# Altium PCB AVR精简学习板.PcbDoc (part 5 of 10)
Units mm, origin at the board's own origin, x right, y up, seen from the top; angles counter-clockwise.
Board outline 152.4 x 101.6 mm, 2 copper layers (Top Layer, Bottom Layer); 44 components, 51 nets, 211 pads, 6 vias.
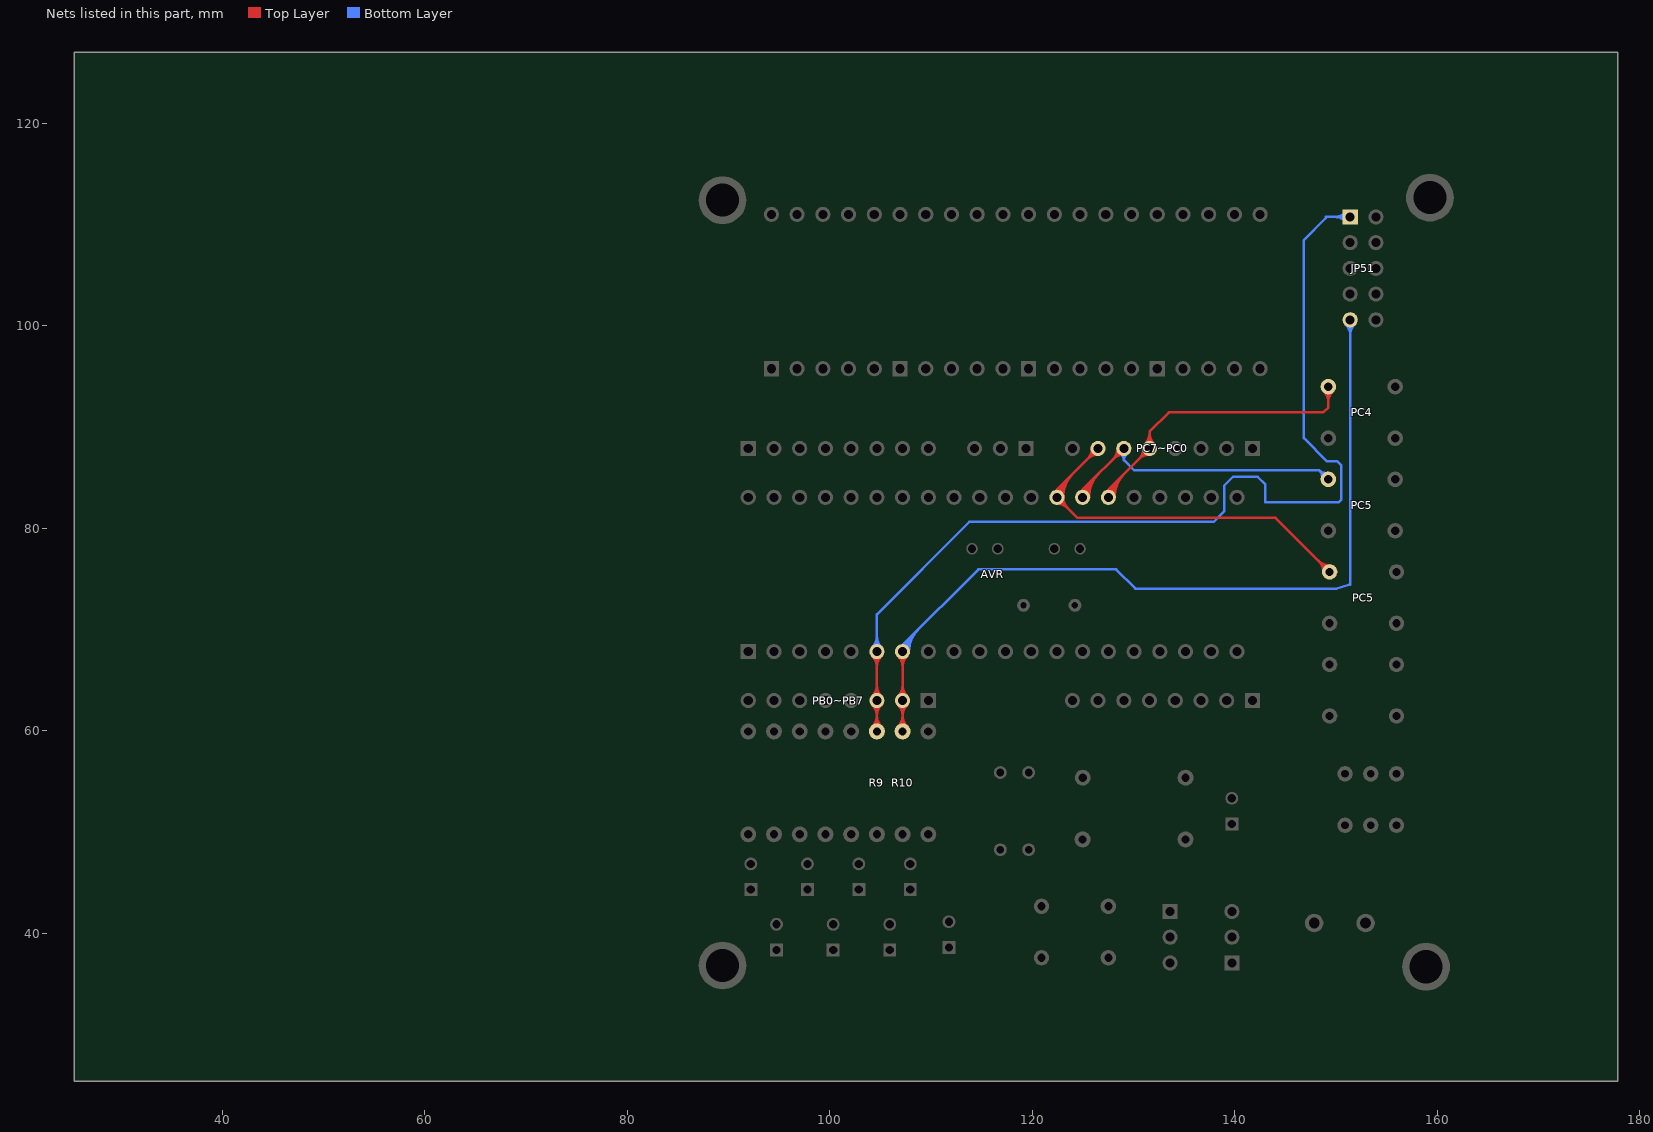
[diagram p5: the nets of this part, all layers, seen from the top]

## Via types
v1: diameter 1.27, hole 0.711, Top Layer to Bottom Layer, 6 vias

## Nets (pads, with @x,y where several pads share a name; then routed paths per layer and width w, separated by ;. In a path a pad name is that pad's centre, name@x,y a point inside that pad or via, vN(x,y) a via of type N, cw(c..) or ccw(c..) an arc to the next point about the centre after c; other vN are vias at no path point) (continued)
MISO: AVR.7 JP51.9 PB0~PB7.2 R10.2 | length 262.9
  Top Layer w0.254: AVR.7@107.188,67.818 PB0~PB7.2@107.188,62.992 PB0~PB7.2@107.188,62.992 R10.2@107.189,59.94 ; R10.2@106.722,60.407 ccw(c105.595,61.535) 107.189,61.535 ; R10.2@106.722,60.407 ccw(c105.595,61.535) 107.189,61.535 ; R10.2@106.722,60.407 ccw(c105.595,61.535) 107.189,61.535 ; R10.2@106.722,60.407 ccw(c105.595,61.535) 107.189,61.535 ; R10.2@106.722,60.407 ccw(c105.595,61.535) 107.189,61.535 ; R10.2@106.722,60.407 ccw(c105.595,61.535) 107.189,61.535 ; R10.2@106.722,60.407 ccw(c105.595,61.535) 107.189,61.535 ; PB0~PB7.2@106.747,62.551 cw(c105.682,61.486) 107.189,61.486 ; PB0~PB7.2@106.747,62.551 cw(c105.682,61.486) 107.189,61.486 ; PB0~PB7.2@106.747,62.551 cw(c105.682,61.486) 107.189,61.486 ; PB0~PB7.2@106.747,62.551 cw(c105.682,61.486) 107.189,61.486 ; PB0~PB7.2@106.747,62.551 cw(c105.682,61.486) 107.189,61.486 ; PB0~PB7.2@106.747,62.551 cw(c105.682,61.486) 107.189,61.486 ; PB0~PB7.2@106.747,62.551 cw(c105.682,61.486) 107.189,61.486 ; PB0~PB7.2@106.747,63.433 ccw(c105.684,64.496) 107.188,64.496 ; PB0~PB7.2@106.747,63.433 ccw(c105.684,64.496) 107.188,64.496 ; PB0~PB7.2@106.747,63.433 ccw(c105.684,64.496) 107.188,64.496 ; PB0~PB7.2@106.747,63.433 ccw(c105.684,64.496) 107.188,64.496 ; PB0~PB7.2@106.747,63.433 ccw(c105.684,64.496) 107.188,64.496 ; PB0~PB7.2@106.747,63.433 ccw(c105.684,64.496) 107.188,64.496 ; PB0~PB7.2@106.747,63.433 ccw(c105.684,64.496) 107.188,64.496 ; AVR.7@106.747,67.377 cw(c105.684,66.314) 107.188,66.314 ; AVR.7@106.747,67.377 cw(c105.684,66.314) 107.188,66.314 ; AVR.7@106.747,67.377 cw(c105.684,66.314) 107.188,66.314 ; AVR.7@106.747,67.377 cw(c105.684,66.314) 107.188,66.314 ; AVR.7@106.747,67.377 cw(c105.684,66.314) 107.188,66.314 ; AVR.7@106.747,67.377 cw(c105.684,66.314) 107.188,66.314 ; AVR.7@106.747,67.377 cw(c105.684,66.314) 107.188,66.314 ; R10.2@106.902,60.228 ccw(c106.208,60.921) 107.189,60.921 ; R10.2@106.902,60.228 ccw(c106.208,60.921) 107.189,60.921 ; R10.2@106.902,60.228 ccw(c106.208,60.921) 107.189,60.921 ; R10.2@106.902,60.228 ccw(c106.208,60.921) 107.189,60.921 ; R10.2@106.902,60.228 ccw(c106.208,60.921) 107.189,60.921 ; R10.2@106.902,60.228 ccw(c106.208,60.921) 107.189,60.921 ; R10.2@106.902,60.228 ccw(c106.208,60.921) 107.189,60.921 ; PB0~PB7.2@106.927,62.731 cw(c106.295,62.099) 107.189,62.099 ; PB0~PB7.2@106.927,62.731 cw(c106.295,62.099) 107.189,62.099 ; PB0~PB7.2@106.927,62.731 cw(c106.295,62.099) 107.189,62.099 ; PB0~PB7.2@106.927,62.731 cw(c106.295,62.099) 107.189,62.099 ; PB0~PB7.2@106.927,62.731 cw(c106.295,62.099) 107.189,62.099 ; PB0~PB7.2@106.927,62.731 cw(c106.295,62.099) 107.189,62.099 ; PB0~PB7.2@106.927,62.731 cw(c106.295,62.099) 107.189,62.099 ; PB0~PB7.2@106.927,63.253 ccw(c106.297,63.883) 107.188,63.883 ; PB0~PB7.2@106.927,63.253 ccw(c106.297,63.883) 107.188,63.883 ; PB0~PB7.2@106.927,63.253 ccw(c106.297,63.883) 107.188,63.883 ; PB0~PB7.2@106.927,63.253 ccw(c106.297,63.883) 107.188,63.883 ; PB0~PB7.2@106.927,63.253 ccw(c106.297,63.883) 107.188,63.883 ; PB0~PB7.2@106.927,63.253 ccw(c106.297,63.883) 107.188,63.883 ; PB0~PB7.2@106.927,63.253 ccw(c106.297,63.883) 107.188,63.883 ; AVR.7@106.927,67.557 cw(c106.297,66.927) 107.188,66.927 ; AVR.7@106.927,67.557 cw(c106.297,66.927) 107.188,66.927 ; AVR.7@106.927,67.557 cw(c106.297,66.927) 107.188,66.927 ; AVR.7@106.927,67.557 cw(c106.297,66.927) 107.188,66.927 ; AVR.7@106.927,67.557 cw(c106.297,66.927) 107.188,66.927 ; AVR.7@106.927,67.557 cw(c106.297,66.927) 107.188,66.927 ; AVR.7@106.927,67.557 cw(c106.297,66.927) 107.188,66.927 ; 107.188,63.883 ccw(c108.079,63.883) PB0~PB7.2@107.449,63.253 ; 107.188,63.883 ccw(c108.079,63.883) PB0~PB7.2@107.449,63.253 ; 107.188,63.883 ccw(c108.079,63.883) PB0~PB7.2@107.449,63.253 ; 107.188,63.883 ccw(c108.079,63.883) PB0~PB7.2@107.449,63.253 ; 107.188,63.883 ccw(c108.079,63.883) PB0~PB7.2@107.449,63.253 ; 107.188,63.883 ccw(c108.079,63.883) PB0~PB7.2@107.449,63.253 ; 107.188,63.883 ccw(c108.079,63.883) PB0~PB7.2@107.449,63.253 ; 107.188,64.496 ccw(c108.692,64.496) PB0~PB7.2@107.629,63.433 ; 107.188,64.496 ccw(c108.692,64.496) PB0~PB7.2@107.629,63.433 ; 107.188,64.496 ccw(c108.692,64.496) PB0~PB7.2@107.629,63.433 ; 107.188,64.496 ccw(c108.692,64.496) PB0~PB7.2@107.629,63.433 ; 107.188,64.496 ccw(c108.692,64.496) PB0~PB7.2@107.629,63.433 ; 107.188,64.496 ccw(c108.692,64.496) PB0~PB7.2@107.629,63.433 ; 107.188,64.496 ccw(c108.692,64.496) PB0~PB7.2@107.629,63.433 ; 107.188,66.314 cw(c108.692,66.314) AVR.7@107.629,67.377 ; 107.188,66.314 cw(c108.692,66.314) AVR.7@107.629,67.377 ; 107.188,66.314 cw(c108.692,66.314) AVR.7@107.629,67.377 ; 107.188,66.314 cw(c108.692,66.314) AVR.7@107.629,67.377 ; 107.188,66.314 cw(c108.692,66.314) AVR.7@107.629,67.377 ; 107.188,66.314 cw(c108.692,66.314) AVR.7@107.629,67.377 ; 107.188,66.314 cw(c108.692,66.314) AVR.7@107.629,67.377 ; 107.188,66.927 cw(c108.079,66.927) AVR.7@107.449,67.557 ; 107.188,66.927 cw(c108.079,66.927) AVR.7@107.449,67.557 ; 107.188,66.927 cw(c108.079,66.927) AVR.7@107.449,67.557 ; 107.188,66.927 cw(c108.079,66.927) AVR.7@107.449,67.557 ; 107.188,66.927 cw(c108.079,66.927) AVR.7@107.449,67.557 ; 107.188,66.927 cw(c108.079,66.927) AVR.7@107.449,67.557 ; 107.188,66.927 cw(c108.079,66.927) AVR.7@107.449,67.557 ; 107.189,60.921 ccw(c108.17,60.921) R10.2@107.476,60.228 ; 107.189,60.921 ccw(c108.17,60.921) R10.2@107.476,60.228 ; 107.189,60.921 ccw(c108.17,60.921) R10.2@107.476,60.228 ; 107.189,60.921 ccw(c108.17,60.921) R10.2@107.476,60.228 ; 107.189,60.921 ccw(c108.17,60.921) R10.2@107.476,60.228 ; 107.189,60.921 ccw(c108.17,60.921) R10.2@107.476,60.228 ; 107.189,60.921 ccw(c108.17,60.921) R10.2@107.476,60.228 ; 107.189,61.49 cw(c108.69,61.49) PB0~PB7.2@107.629,62.551 ; 107.189,61.49 cw(c108.69,61.49) PB0~PB7.2@107.629,62.551 ; 107.189,61.49 cw(c108.69,61.49) PB0~PB7.2@107.629,62.551 ; 107.189,61.49 cw(c108.69,61.49) PB0~PB7.2@107.629,62.551 ; 107.189,61.49 cw(c108.69,61.49) PB0~PB7.2@107.629,62.551 ; 107.189,61.49 cw(c108.69,61.49) PB0~PB7.2@107.629,62.551 ; 107.189,61.49 cw(c108.69,61.49) PB0~PB7.2@107.629,62.551 ; 107.189,61.535 ccw(c108.783,61.535) R10.2@107.656,60.407 ; 107.189,61.535 ccw(c108.783,61.535) R10.2@107.656,60.407 ; 107.189,61.535 ccw(c108.783,61.535) R10.2@107.656,60.407 ; 107.189,61.535 ccw(c108.783,61.535) R10.2@107.656,60.407 ; 107.189,61.535 ccw(c108.783,61.535) R10.2@107.656,60.407 ; 107.189,61.535 ccw(c108.783,61.535) R10.2@107.656,60.407 ; 107.189,61.535 ccw(c108.783,61.535) R10.2@107.656,60.407 ; 107.189,62.104 cw(c108.076,62.104) PB0~PB7.2@107.449,62.731 ; 107.189,62.104 cw(c108.076,62.104) PB0~PB7.2@107.449,62.731 ; 107.189,62.104 cw(c108.076,62.104) PB0~PB7.2@107.449,62.731 ; 107.189,62.104 cw(c108.076,62.104) PB0~PB7.2@107.449,62.731 ; 107.189,62.104 cw(c108.076,62.104) PB0~PB7.2@107.449,62.731 ; 107.189,62.104 cw(c108.076,62.104) PB0~PB7.2@107.449,62.731 ; 107.189,62.104 cw(c108.076,62.104) PB0~PB7.2@107.449,62.731
  Bottom Layer w0.254: AVR.7@107.188,67.818 107.188,68.453 114.681,75.946 128.27,75.946 130.175,74.041 149.987,74.041 151.257,74.422 ; 151.384,74.422 JP51.9@151.384,100.584 ; AVR.7@107.049,67.818 cw(c108.246,67.818) 107.4,68.665 ; AVR.7@107.049,67.818 cw(c108.246,67.818) 107.4,68.665 ; AVR.7@107.049,67.818 cw(c108.246,67.818) 107.4,68.665 ; AVR.7@107.049,67.818 cw(c108.246,67.818) 107.4,68.665 ; AVR.7@107.049,67.818 cw(c108.246,67.818) 107.4,68.665 ; AVR.7@107.049,67.818 cw(c108.246,67.818) 107.4,68.665 ; AVR.7@107.049,67.818 cw(c108.246,67.818) 107.4,68.665 ; AVR.7@107.303,67.818 cw(c109.114,67.818) 107.833,69.098 ; AVR.7@107.303,67.818 cw(c109.114,67.818) 107.833,69.098 ; AVR.7@107.303,67.818 cw(c109.114,67.818) 107.833,69.098 ; AVR.7@107.303,67.818 cw(c109.114,67.818) 107.833,69.098 ; AVR.7@107.303,67.818 cw(c109.114,67.818) 107.833,69.098 ; AVR.7@107.303,67.818 cw(c109.114,67.818) 107.833,69.098 ; AVR.7@107.303,67.818 cw(c109.114,67.818) 107.833,69.098 ; AVR.7@107.557,67.818 cw(c109.981,67.818) 108.267,69.532 ; AVR.7@107.557,67.818 cw(c109.981,67.818) 108.267,69.532 ; AVR.7@107.557,67.818 cw(c109.981,67.818) 108.267,69.532 ; AVR.7@107.557,67.818 cw(c109.981,67.818) 108.267,69.532 ; AVR.7@107.557,67.818 cw(c109.981,67.818) 108.267,69.532 ; AVR.7@107.557,67.818 cw(c109.981,67.818) 108.267,69.532 ; AVR.7@107.557,67.818 cw(c109.981,67.818) 108.267,69.532 ; AVR.7@107.811,67.818 cw(c110.848,67.818) 108.701,69.966 ; AVR.7@107.811,67.818 cw(c110.848,67.818) 108.701,69.966 ; AVR.7@107.811,67.818 cw(c110.848,67.818) 108.701,69.966 ; AVR.7@107.811,67.818 cw(c110.848,67.818) 108.701,69.966 ; AVR.7@107.811,67.818 cw(c110.848,67.818) 108.701,69.966 ; AVR.7@107.811,67.818 cw(c110.848,67.818) 108.701,69.966 ; AVR.7@107.811,67.818 cw(c110.848,67.818) 108.701,69.966 ; JP51.9@150.943,100.143 cw(c149.88,99.08) 151.384,99.08 ; JP51.9@150.943,100.143 cw(c149.88,99.08) 151.384,99.08 ; JP51.9@150.943,100.143 cw(c149.88,99.08) 151.384,99.08 ; JP51.9@150.943,100.143 cw(c149.88,99.08) 151.384,99.08 ; JP51.9@150.943,100.143 cw(c149.88,99.08) 151.384,99.08 ; JP51.9@150.943,100.143 cw(c149.88,99.08) 151.384,99.08 ; JP51.9@150.943,100.143 cw(c149.88,99.08) 151.384,99.08 ; JP51.9@151.123,100.323 cw(c150.493,99.693) 151.384,99.693 ; JP51.9@151.123,100.323 cw(c150.493,99.693) 151.384,99.693 ; JP51.9@151.123,100.323 cw(c150.493,99.693) 151.384,99.693 ; JP51.9@151.123,100.323 cw(c150.493,99.693) 151.384,99.693 ; JP51.9@151.123,100.323 cw(c150.493,99.693) 151.384,99.693 ; JP51.9@151.123,100.323 cw(c150.493,99.693) 151.384,99.693 ; JP51.9@151.123,100.323 cw(c150.493,99.693) 151.384,99.693 ; 151.384,99.08 cw(c152.888,99.08) JP51.9@151.825,100.143 ; 151.384,99.08 cw(c152.888,99.08) JP51.9@151.825,100.143 ; 151.384,99.08 cw(c152.888,99.08) JP51.9@151.825,100.143 ; 151.384,99.08 cw(c152.888,99.08) JP51.9@151.825,100.143 ; 151.384,99.08 cw(c152.888,99.08) JP51.9@151.825,100.143 ; 151.384,99.08 cw(c152.888,99.08) JP51.9@151.825,100.143 ; 151.384,99.08 cw(c152.888,99.08) JP51.9@151.825,100.143 ; 151.384,99.693 cw(c152.275,99.693) JP51.9@151.645,100.323 ; 151.384,99.693 cw(c152.275,99.693) JP51.9@151.645,100.323 ; 151.384,99.693 cw(c152.275,99.693) JP51.9@151.645,100.323 ; 151.384,99.693 cw(c152.275,99.693) JP51.9@151.645,100.323 ; 151.384,99.693 cw(c152.275,99.693) JP51.9@151.645,100.323 ; 151.384,99.693 cw(c152.275,99.693) JP51.9@151.645,100.323 ; 151.384,99.693 cw(c152.275,99.693) JP51.9@151.645,100.323
MOSI: AVR.6 JP51.1 PB0~PB7.3 R9.2 | length 260.1
  Top Layer w0.254: AVR.6@104.648,67.818 PB0~PB7.3@104.648,62.992 PB0~PB7.3@104.648,62.992 R9.2@104.649,59.94 ; R9.2@104.182,60.407 ccw(c103.055,61.535) 104.649,61.535 ; R9.2@104.182,60.407 ccw(c103.055,61.535) 104.649,61.535 ; R9.2@104.182,60.407 ccw(c103.055,61.535) 104.649,61.535 ; R9.2@104.182,60.407 ccw(c103.055,61.535) 104.649,61.535 ; R9.2@104.182,60.407 ccw(c103.055,61.535) 104.649,61.535 ; R9.2@104.182,60.407 ccw(c103.055,61.535) 104.649,61.535 ; R9.2@104.182,60.407 ccw(c103.055,61.535) 104.649,61.535 ; PB0~PB7.3@104.207,62.551 cw(c103.142,61.486) 104.649,61.486 ; PB0~PB7.3@104.207,62.551 cw(c103.142,61.486) 104.649,61.486 ; PB0~PB7.3@104.207,62.551 cw(c103.142,61.486) 104.649,61.486 ; PB0~PB7.3@104.207,62.551 cw(c103.142,61.486) 104.649,61.486 ; PB0~PB7.3@104.207,62.551 cw(c103.142,61.486) 104.649,61.486 ; PB0~PB7.3@104.207,62.551 cw(c103.142,61.486) 104.649,61.486 ; PB0~PB7.3@104.207,62.551 cw(c103.142,61.486) 104.649,61.486 ; PB0~PB7.3@104.207,63.433 ccw(c103.144,64.496) 104.648,64.496 ; PB0~PB7.3@104.207,63.433 ccw(c103.144,64.496) 104.648,64.496 ; PB0~PB7.3@104.207,63.433 ccw(c103.144,64.496) 104.648,64.496 ; PB0~PB7.3@104.207,63.433 ccw(c103.144,64.496) 104.648,64.496 ; PB0~PB7.3@104.207,63.433 ccw(c103.144,64.496) 104.648,64.496 ; PB0~PB7.3@104.207,63.433 ccw(c103.144,64.496) 104.648,64.496 ; PB0~PB7.3@104.207,63.433 ccw(c103.144,64.496) 104.648,64.496 ; AVR.6@104.207,67.377 cw(c103.144,66.314) 104.648,66.314 ; AVR.6@104.207,67.377 cw(c103.144,66.314) 104.648,66.314 ; AVR.6@104.207,67.377 cw(c103.144,66.314) 104.648,66.314 ; AVR.6@104.207,67.377 cw(c103.144,66.314) 104.648,66.314 ; AVR.6@104.207,67.377 cw(c103.144,66.314) 104.648,66.314 ; AVR.6@104.207,67.377 cw(c103.144,66.314) 104.648,66.314 ; AVR.6@104.207,67.377 cw(c103.144,66.314) 104.648,66.314 ; R9.2@104.362,60.228 ccw(c103.668,60.921) 104.649,60.921 ; R9.2@104.362,60.228 ccw(c103.668,60.921) 104.649,60.921 ; R9.2@104.362,60.228 ccw(c103.668,60.921) 104.649,60.921 ; R9.2@104.362,60.228 ccw(c103.668,60.921) 104.649,60.921 ; R9.2@104.362,60.228 ccw(c103.668,60.921) 104.649,60.921 ; R9.2@104.362,60.228 ccw(c103.668,60.921) 104.649,60.921 ; R9.2@104.362,60.228 ccw(c103.668,60.921) 104.649,60.921 ; PB0~PB7.3@104.387,62.731 cw(c103.755,62.099) 104.649,62.099 ; PB0~PB7.3@104.387,62.731 cw(c103.755,62.099) 104.649,62.099 ; PB0~PB7.3@104.387,62.731 cw(c103.755,62.099) 104.649,62.099 ; PB0~PB7.3@104.387,62.731 cw(c103.755,62.099) 104.649,62.099 ; PB0~PB7.3@104.387,62.731 cw(c103.755,62.099) 104.649,62.099 ; PB0~PB7.3@104.387,62.731 cw(c103.755,62.099) 104.649,62.099 ; PB0~PB7.3@104.387,62.731 cw(c103.755,62.099) 104.649,62.099 ; PB0~PB7.3@104.387,63.253 ccw(c103.757,63.883) 104.648,63.883 ; PB0~PB7.3@104.387,63.253 ccw(c103.757,63.883) 104.648,63.883 ; PB0~PB7.3@104.387,63.253 ccw(c103.757,63.883) 104.648,63.883 ; PB0~PB7.3@104.387,63.253 ccw(c103.757,63.883) 104.648,63.883 ; PB0~PB7.3@104.387,63.253 ccw(c103.757,63.883) 104.648,63.883 ; PB0~PB7.3@104.387,63.253 ccw(c103.757,63.883) 104.648,63.883 ; PB0~PB7.3@104.387,63.253 ccw(c103.757,63.883) 104.648,63.883 ; AVR.6@104.387,67.557 cw(c103.757,66.927) 104.648,66.927 ; AVR.6@104.387,67.557 cw(c103.757,66.927) 104.648,66.927 ; AVR.6@104.387,67.557 cw(c103.757,66.927) 104.648,66.927 ; AVR.6@104.387,67.557 cw(c103.757,66.927) 104.648,66.927 ; AVR.6@104.387,67.557 cw(c103.757,66.927) 104.648,66.927 ; AVR.6@104.387,67.557 cw(c103.757,66.927) 104.648,66.927 ; AVR.6@104.387,67.557 cw(c103.757,66.927) 104.648,66.927 ; 104.648,63.883 ccw(c105.539,63.883) PB0~PB7.3@104.909,63.253 ; 104.648,63.883 ccw(c105.539,63.883) PB0~PB7.3@104.909,63.253 ; 104.648,63.883 ccw(c105.539,63.883) PB0~PB7.3@104.909,63.253 ; 104.648,63.883 ccw(c105.539,63.883) PB0~PB7.3@104.909,63.253 ; 104.648,63.883 ccw(c105.539,63.883) PB0~PB7.3@104.909,63.253 ; 104.648,63.883 ccw(c105.539,63.883) PB0~PB7.3@104.909,63.253 ; 104.648,63.883 ccw(c105.539,63.883) PB0~PB7.3@104.909,63.253 ; 104.648,64.496 ccw(c106.152,64.496) PB0~PB7.3@105.089,63.433 ; 104.648,64.496 ccw(c106.152,64.496) PB0~PB7.3@105.089,63.433 ; 104.648,64.496 ccw(c106.152,64.496) PB0~PB7.3@105.089,63.433 ; 104.648,64.496 ccw(c106.152,64.496) PB0~PB7.3@105.089,63.433 ; 104.648,64.496 ccw(c106.152,64.496) PB0~PB7.3@105.089,63.433 ; 104.648,64.496 ccw(c106.152,64.496) PB0~PB7.3@105.089,63.433 ; 104.648,64.496 ccw(c106.152,64.496) PB0~PB7.3@105.089,63.433 ; 104.648,66.314 cw(c106.152,66.314) AVR.6@105.089,67.377 ; 104.648,66.314 cw(c106.152,66.314) AVR.6@105.089,67.377 ; 104.648,66.314 cw(c106.152,66.314) AVR.6@105.089,67.377 ; 104.648,66.314 cw(c106.152,66.314) AVR.6@105.089,67.377 ; 104.648,66.314 cw(c106.152,66.314) AVR.6@105.089,67.377 ; 104.648,66.314 cw(c106.152,66.314) AVR.6@105.089,67.377 ; 104.648,66.314 cw(c106.152,66.314) AVR.6@105.089,67.377 ; 104.648,66.927 cw(c105.539,66.927) AVR.6@104.909,67.557 ; 104.648,66.927 cw(c105.539,66.927) AVR.6@104.909,67.557 ; 104.648,66.927 cw(c105.539,66.927) AVR.6@104.909,67.557 ; 104.648,66.927 cw(c105.539,66.927) AVR.6@104.909,67.557 ; 104.648,66.927 cw(c105.539,66.927) AVR.6@104.909,67.557 ; 104.648,66.927 cw(c105.539,66.927) AVR.6@104.909,67.557 ; 104.648,66.927 cw(c105.539,66.927) AVR.6@104.909,67.557 ; 104.649,60.921 ccw(c105.63,60.921) R9.2@104.936,60.228 ; 104.649,60.921 ccw(c105.63,60.921) R9.2@104.936,60.228 ; 104.649,60.921 ccw(c105.63,60.921) R9.2@104.936,60.228 ; 104.649,60.921 ccw(c105.63,60.921) R9.2@104.936,60.228 ; 104.649,60.921 ccw(c105.63,60.921) R9.2@104.936,60.228 ; 104.649,60.921 ccw(c105.63,60.921) R9.2@104.936,60.228 ; 104.649,60.921 ccw(c105.63,60.921) R9.2@104.936,60.228 ; 104.649,61.49 cw(c106.15,61.49) PB0~PB7.3@105.089,62.551 ; 104.649,61.49 cw(c106.15,61.49) PB0~PB7.3@105.089,62.551 ; 104.649,61.49 cw(c106.15,61.49) PB0~PB7.3@105.089,62.551 ; 104.649,61.49 cw(c106.15,61.49) PB0~PB7.3@105.089,62.551 ; 104.649,61.49 cw(c106.15,61.49) PB0~PB7.3@105.089,62.551 ; 104.649,61.49 cw(c106.15,61.49) PB0~PB7.3@105.089,62.551 ; 104.649,61.49 cw(c106.15,61.49) PB0~PB7.3@105.089,62.551 ; 104.649,61.535 ccw(c106.243,61.535) R9.2@105.116,60.407 ; 104.649,61.535 ccw(c106.243,61.535) R9.2@105.116,60.407 ; 104.649,61.535 ccw(c106.243,61.535) R9.2@105.116,60.407 ; 104.649,61.535 ccw(c106.243,61.535) R9.2@105.116,60.407 ; 104.649,61.535 ccw(c106.243,61.535) R9.2@105.116,60.407 ; 104.649,61.535 ccw(c106.243,61.535) R9.2@105.116,60.407 ; 104.649,61.535 ccw(c106.243,61.535) R9.2@105.116,60.407 ; 104.649,62.104 cw(c105.536,62.104) PB0~PB7.3@104.909,62.731 ; 104.649,62.104 cw(c105.536,62.104) PB0~PB7.3@104.909,62.731 ; 104.649,62.104 cw(c105.536,62.104) PB0~PB7.3@104.909,62.731 ; 104.649,62.104 cw(c105.536,62.104) PB0~PB7.3@104.909,62.731 ; 104.649,62.104 cw(c105.536,62.104) PB0~PB7.3@104.909,62.731 ; 104.649,62.104 cw(c105.536,62.104) PB0~PB7.3@104.909,62.731 ; 104.649,62.104 cw(c105.536,62.104) PB0~PB7.3@104.909,62.731
  Bottom Layer w0.254: AVR.6@104.648,67.818 104.648,71.501 113.792,80.645 137.922,80.645 138.938,81.661 138.938,84.201 139.827,85.09 142.24,85.09 143.002,84.328 143.002,82.55 150.241,82.55 150.495,82.804 150.495,86.233 150.114,86.614 149.098,86.614 146.812,88.9 146.812,108.458 148.971,110.617 148.971,110.744 JP51.1@151.384,110.744 ; AVR.6@104.207,68.259 ccw(c103.144,69.322) 104.648,69.322 ; AVR.6@104.207,68.259 ccw(c103.144,69.322) 104.648,69.322 ; AVR.6@104.207,68.259 ccw(c103.144,69.322) 104.648,69.322 ; AVR.6@104.207,68.259 ccw(c103.144,69.322) 104.648,69.322 ; AVR.6@104.207,68.259 ccw(c103.144,69.322) 104.648,69.322 ; AVR.6@104.207,68.259 ccw(c103.144,69.322) 104.648,69.322 ; AVR.6@104.207,68.259 ccw(c103.144,69.322) 104.648,69.322 ; AVR.6@104.387,68.079 ccw(c103.757,68.709) 104.648,68.709 ; AVR.6@104.387,68.079 ccw(c103.757,68.709) 104.648,68.709 ; AVR.6@104.387,68.079 ccw(c103.757,68.709) 104.648,68.709 ; AVR.6@104.387,68.079 ccw(c103.757,68.709) 104.648,68.709 ; AVR.6@104.387,68.079 ccw(c103.757,68.709) 104.648,68.709 ; AVR.6@104.387,68.079 ccw(c103.757,68.709) 104.648,68.709 ; AVR.6@104.387,68.079 ccw(c103.757,68.709) 104.648,68.709 ; 104.648,68.709 ccw(c105.539,68.709) AVR.6@104.909,68.079 ; 104.648,68.709 ccw(c105.539,68.709) AVR.6@104.909,68.079 ; 104.648,68.709 ccw(c105.539,68.709) AVR.6@104.909,68.079 ; 104.648,68.709 ccw(c105.539,68.709) AVR.6@104.909,68.079 ; 104.648,68.709 ccw(c105.539,68.709) AVR.6@104.909,68.079 ; 104.648,68.709 ccw(c105.539,68.709) AVR.6@104.909,68.079 ; 104.648,68.709 ccw(c105.539,68.709) AVR.6@104.909,68.079 ; 104.648,69.322 ccw(c106.152,69.322) AVR.6@105.089,68.259 ; 104.648,69.322 ccw(c106.152,69.322) AVR.6@105.089,68.259 ; 104.648,69.322 ccw(c106.152,69.322) AVR.6@105.089,68.259 ; 104.648,69.322 ccw(c106.152,69.322) AVR.6@105.089,68.259 ; 104.648,69.322 ccw(c106.152,69.322) AVR.6@105.089,68.259 ; 104.648,69.322 ccw(c106.152,69.322) AVR.6@105.089,68.259 ; 104.648,69.322 ccw(c106.152,69.322) AVR.6@105.089,68.259 ; 149.88,110.744 cw(c149.88,109.24) JP51.1@150.943,110.303 ; 149.88,110.744 ccw(c149.88,112.248) JP51.1@150.943,111.185 ; 149.88,110.744 cw(c149.88,109.24) JP51.1@150.943,110.303 ; 149.88,110.744 ccw(c149.88,112.248) JP51.1@150.943,111.185 ; 149.88,110.744 ccw(c149.88,112.248) JP51.1@150.943,111.185 ; 149.88,110.744 cw(c149.88,109.24) JP51.1@150.943,110.303 ; 149.88,110.744 ccw(c149.88,112.248) JP51.1@150.943,111.185 ; 149.88,110.744 cw(c149.88,109.24) JP51.1@150.943,110.303 ; 149.88,110.744 ccw(c149.88,112.248) JP51.1@150.943,111.185 ; 149.88,110.744 cw(c149.88,109.24) JP51.1@150.943,110.303 ; 149.88,110.744 ccw(c149.88,112.248) JP51.1@150.943,111.185 ; 149.88,110.744 cw(c149.88,109.24) JP51.1@150.943,110.303 ; 149.88,110.744 ccw(c149.88,112.248) JP51.1@150.943,111.185 ; 149.88,110.744 cw(c149.88,109.24) JP51.1@150.943,110.303 ; 150.493,110.744 cw(c150.493,109.853) JP51.1@151.123,110.483 ; 150.493,110.744 ccw(c150.493,111.635) JP51.1@151.123,111.005 ; 150.493,110.744 cw(c150.493,109.853) JP51.1@151.123,110.483 ; 150.493,110.744 ccw(c150.493,111.635) JP51.1@151.123,111.005 ; 150.493,110.744 ccw(c150.493,111.635) JP51.1@151.123,111.005 ; 150.493,110.744 cw(c150.493,109.853) JP51.1@151.123,110.483 ; 150.493,110.744 ccw(c150.493,111.635) JP51.1@151.123,111.005 ; 150.493,110.744 cw(c150.493,109.853) JP51.1@151.123,110.483 ; 150.493,110.744 ccw(c150.493,111.635) JP51.1@151.123,111.005 ; 150.493,110.744 cw(c150.493,109.853) JP51.1@151.123,110.483 ; 150.493,110.744 ccw(c150.493,111.635) JP51.1@151.123,111.005 ; 150.493,110.744 cw(c150.493,109.853) JP51.1@151.123,110.483 ; 150.493,110.744 ccw(c150.493,111.635) JP51.1@151.123,111.005 ; 150.493,110.744 cw(c150.493,109.853) JP51.1@151.123,110.483
Net1_0: AVR.26 PC4.0 PC7~PC0.5 | length 164.8
  Top Layer w0.254: AVR.26@127.508,83.058 127.508,83.82 ; PC4.0@149.225,93.98 149.225,91.948 148.717,91.44 133.477,91.44 131.572,89.535 PC7~PC0.5@131.572,87.884 127.508,83.82 ; AVR.26@127.369,83.058 cw(c128.873,83.058) 127.81,84.122 ; AVR.26@127.369,83.058 cw(c128.873,83.058) 127.81,84.122 ; AVR.26@127.369,83.058 cw(c128.873,83.058) 127.81,84.122 ; AVR.26@127.369,83.058 cw(c128.873,83.058) 127.81,84.122 ; AVR.26@127.369,83.058 cw(c128.873,83.058) 127.81,84.122 ; AVR.26@127.369,83.058 cw(c128.873,83.058) 127.81,84.122 ; AVR.26@127.369,83.058 cw(c128.873,83.058) 127.81,84.122 ; AVR.26@127.384,83.669 ccw(c127.354,83.82) 127.508,83.82 ; AVR.26@127.384,83.669 ccw(c127.354,83.82) 127.508,83.82 ; AVR.26@127.384,83.669 ccw(c127.354,83.82) 127.508,83.82 ; AVR.26@127.384,83.669 ccw(c127.354,83.82) 127.508,83.82 ; AVR.26@127.384,83.669 ccw(c127.354,83.82) 127.508,83.82 ; AVR.26@127.384,83.669 ccw(c127.354,83.82) 127.508,83.82 ; AVR.26@127.384,83.669 ccw(c127.354,83.82) 127.508,83.82 ; 127.508,83.82 ccw(c127.662,83.82) AVR.26@127.632,83.669 ; 127.508,83.82 ccw(c127.662,83.82) AVR.26@127.632,83.669 ; 127.508,83.82 ccw(c127.662,83.82) AVR.26@127.632,83.669 ; 127.508,83.82 ccw(c127.662,83.82) AVR.26@127.632,83.669 ; 127.508,83.82 ccw(c127.662,83.82) AVR.26@127.632,83.669 ; 127.508,83.82 ccw(c127.662,83.82) AVR.26@127.632,83.669 ; 127.508,83.82 ccw(c127.662,83.82) AVR.26@127.632,83.669 ; AVR.26@127.623,83.058 cw(c129.74,83.058) 128.243,84.555 ; AVR.26@127.623,83.058 cw(c129.74,83.058) 128.243,84.555 ; AVR.26@127.623,83.058 cw(c129.74,83.058) 128.243,84.555 ; AVR.26@127.623,83.058 cw(c129.74,83.058) 128.243,84.555 ; AVR.26@127.623,83.058 cw(c129.74,83.058) 128.243,84.555 ; AVR.26@127.623,83.058 cw(c129.74,83.058) 128.243,84.555 ; AVR.26@127.623,83.058 cw(c129.74,83.058) 128.243,84.555 ; AVR.26@127.877,83.058 cw(c130.607,83.058) 128.677,84.989 ; AVR.26@127.877,83.058 cw(c130.607,83.058) 128.677,84.989 ; AVR.26@127.877,83.058 cw(c130.607,83.058) 128.677,84.989 ; AVR.26@127.877,83.058 cw(c130.607,83.058) 128.677,84.989 ; AVR.26@127.877,83.058 cw(c130.607,83.058) 128.677,84.989 ; AVR.26@127.877,83.058 cw(c130.607,83.058) 128.677,84.989 ; AVR.26@127.877,83.058 cw(c130.607,83.058) 128.677,84.989 ; AVR.26@128.131,83.058 cw(c131.475,83.058) 129.11,85.422 ; AVR.26@128.131,83.058 cw(c131.475,83.058) 129.11,85.422 ; AVR.26@128.131,83.058 cw(c131.475,83.058) 129.11,85.422 ; AVR.26@128.131,83.058 cw(c131.475,83.058) 129.11,85.422 ; AVR.26@128.131,83.058 cw(c131.475,83.058) 129.11,85.422 ; AVR.26@128.131,83.058 cw(c131.475,83.058) 129.11,85.422 ; AVR.26@128.131,83.058 cw(c131.475,83.058) 129.11,85.422 ; 130.508,86.82 cw(c131.572,85.757) PC7~PC0.5@131.572,87.261 ; 130.508,86.82 ccw(c129.445,87.884) PC7~PC0.5@130.949,87.884 ; 130.508,86.82 cw(c131.572,85.757) PC7~PC0.5@131.572,87.261 ; 130.508,86.82 ccw(c129.445,87.884) PC7~PC0.5@130.949,87.884 ; 130.508,86.82 ccw(c129.445,87.884) PC7~PC0.5@130.949,87.884 ; 130.508,86.82 cw(c131.572,85.757) PC7~PC0.5@131.572,87.261 ; 130.508,86.82 ccw(c129.445,87.884) PC7~PC0.5@130.949,87.884 ; 130.508,86.82 cw(c131.572,85.757) PC7~PC0.5@131.572,87.261 ; 130.508,86.82 ccw(c129.445,87.884) PC7~PC0.5@130.949,87.884 ; 130.508,86.82 cw(c131.572,85.757) PC7~PC0.5@131.572,87.261 ; 130.508,86.82 ccw(c129.445,87.884) PC7~PC0.5@130.949,87.884 ; 130.508,86.82 cw(c131.572,85.757) PC7~PC0.5@131.572,87.261 ; 130.508,86.82 ccw(c129.445,87.884) PC7~PC0.5@130.949,87.884 ; 130.508,86.82 cw(c131.572,85.757) PC7~PC0.5@131.572,87.261 ; 130.942,87.254 cw(c131.572,86.624) PC7~PC0.5@131.572,87.515 ; 130.942,87.254 ccw(c130.312,87.884) PC7~PC0.5@131.203,87.884 ; 130.942,87.254 cw(c131.572,86.624) PC7~PC0.5@131.572,87.515 ; 130.942,87.254 ccw(c130.312,87.884) PC7~PC0.5@131.203,87.884 ; 130.942,87.254 ccw(c130.312,87.884) PC7~PC0.5@131.203,87.884 ; 130.942,87.254 cw(c131.572,86.624) PC7~PC0.5@131.572,87.515 ; 130.942,87.254 ccw(c130.312,87.884) PC7~PC0.5@131.203,87.884 ; 130.942,87.254 cw(c131.572,86.624) PC7~PC0.5@131.572,87.515 ; 130.942,87.254 ccw(c130.312,87.884) PC7~PC0.5@131.203,87.884 ; 130.942,87.254 cw(c131.572,86.624) PC7~PC0.5@131.572,87.515 ; 130.942,87.254 ccw(c130.312,87.884) PC7~PC0.5@131.203,87.884 ; 130.942,87.254 cw(c131.572,86.624) PC7~PC0.5@131.572,87.515 ; 130.942,87.254 ccw(c130.312,87.884) PC7~PC0.5@131.203,87.884 ; 130.942,87.254 cw(c131.572,86.624) PC7~PC0.5@131.572,87.515 ; PC7~PC0.5@131.131,88.325 ccw(c130.068,89.388) 131.572,89.388 ; PC7~PC0.5@131.131,88.325 ccw(c130.068,89.388) 131.572,89.388 ; PC7~PC0.5@131.131,88.325 ccw(c130.068,89.388) 131.572,89.388 ; PC7~PC0.5@131.131,88.325 ccw(c130.068,89.388) 131.572,89.388 ; PC7~PC0.5@131.131,88.325 ccw(c130.068,89.388) 131.572,89.388 ; PC7~PC0.5@131.131,88.325 ccw(c130.068,89.388) 131.572,89.388 ; PC7~PC0.5@131.131,88.325 ccw(c130.068,89.388) 131.572,89.388 ; PC7~PC0.5@131.311,88.145 ccw(c130.681,88.775) 131.572,88.775 ; PC7~PC0.5@131.311,88.145 ccw(c130.681,88.775) 131.572,88.775 ; PC7~PC0.5@131.311,88.145 ccw(c130.681,88.775) 131.572,88.775 ; PC7~PC0.5@131.311,88.145 ccw(c130.681,88.775) 131.572,88.775 ; PC7~PC0.5@131.311,88.145 ccw(c130.681,88.775) 131.572,88.775 ; PC7~PC0.5@131.311,88.145 ccw(c130.681,88.775) 131.572,88.775 ; PC7~PC0.5@131.311,88.145 ccw(c130.681,88.775) 131.572,88.775 ; 131.572,88.775 ccw(c132.463,88.775) PC7~PC0.5@131.833,88.145 ; 131.572,88.775 ccw(c132.463,88.775) PC7~PC0.5@131.833,88.145 ; 131.572,88.775 ccw(c132.463,88.775) PC7~PC0.5@131.833,88.145 ; 131.572,88.775 ccw(c132.463,88.775) PC7~PC0.5@131.833,88.145 ; 131.572,88.775 ccw(c132.463,88.775) PC7~PC0.5@131.833,88.145 ; 131.572,88.775 ccw(c132.463,88.775) PC7~PC0.5@131.833,88.145 ; 131.572,88.775 ccw(c132.463,88.775) PC7~PC0.5@131.833,88.145 ; 131.572,89.388 ccw(c133.076,89.388) PC7~PC0.5@132.013,88.325 ; 131.572,89.388 ccw(c133.076,89.388) PC7~PC0.5@132.013,88.325 ; 131.572,89.388 ccw(c133.076,89.388) PC7~PC0.5@132.013,88.325 ; 131.572,89.388 ccw(c133.076,89.388) PC7~PC0.5@132.013,88.325 ; 131.572,89.388 ccw(c133.076,89.388) PC7~PC0.5@132.013,88.325 ; 131.572,89.388 ccw(c133.076,89.388) PC7~PC0.5@132.013,88.325 ; 131.572,89.388 ccw(c133.076,89.388) PC7~PC0.5@132.013,88.325 ; PC4.0@148.776,93.531 cw(c147.692,92.447) 149.225,92.447 ; PC4.0@148.776,93.531 cw(c147.692,92.447) 149.225,92.447 ; PC4.0@148.776,93.531 cw(c147.692,92.447) 149.225,92.447 ; PC4.0@148.776,93.531 cw(c147.692,92.447) 149.225,92.447 ; PC4.0@148.776,93.531 cw(c147.692,92.447) 149.225,92.447 ; PC4.0@148.776,93.531 cw(c147.692,92.447) 149.225,92.447 ; PC4.0@148.776,93.531 cw(c147.692,92.447) 149.225,92.447 ; PC4.0@148.956,93.711 cw(c148.305,93.06) 149.225,93.06 ; PC4.0@148.956,93.711 cw(c148.305,93.06) 149.225,93.06 ; PC4.0@148.956,93.711 cw(c148.305,93.06) 149.225,93.06 ; PC4.0@148.956,93.711 cw(c148.305,93.06) 149.225,93.06 ; PC4.0@148.956,93.711 cw(c148.305,93.06) 149.225,93.06 ; PC4.0@148.956,93.711 cw(c148.305,93.06) 149.225,93.06 ; PC4.0@148.956,93.711 cw(c148.305,93.06) 149.225,93.06 ; 149.225,92.447 cw(c150.758,92.447) PC4.0@149.674,93.531 ; 149.225,92.447 cw(c150.758,92.447) PC4.0@149.674,93.531 ; 149.225,92.447 cw(c150.758,92.447) PC4.0@149.674,93.531 ; 149.225,92.447 cw(c150.758,92.447) PC4.0@149.674,93.531 ; 149.225,92.447 cw(c150.758,92.447) PC4.0@149.674,93.531 ; 149.225,92.447 cw(c150.758,92.447) PC4.0@149.674,93.531 ; 149.225,92.447 cw(c150.758,92.447) PC4.0@149.674,93.531 ; 149.225,93.06 cw(c150.145,93.06) PC4.0@149.494,93.711 ; 149.225,93.06 cw(c150.145,93.06) PC4.0@149.494,93.711 ; 149.225,93.06 cw(c150.145,93.06) PC4.0@149.494,93.711 ; 149.225,93.06 cw(c150.145,93.06) PC4.0@149.494,93.711 ; 149.225,93.06 cw(c150.145,93.06) PC4.0@149.494,93.711 ; 149.225,93.06 cw(c150.145,93.06) PC4.0@149.494,93.711 ; 149.225,93.06 cw(c150.145,93.06) PC4.0@149.494,93.711
Net2_0: AVR.27 PC5.0@149.225,84.836 PC7~PC0.6 | length 133.3
  Top Layer w0.254: AVR.27@124.968,83.058 124.968,83.82 ; PC7~PC0.6@129.032,87.884 124.968,83.82 ; AVR.27@124.829,83.058 cw(c126.333,83.058) 125.27,84.122 ; AVR.27@124.829,83.058 cw(c126.333,83.058) 125.27,84.122 ; AVR.27@124.829,83.058 cw(c126.333,83.058) 125.27,84.122 ; AVR.27@124.829,83.058 cw(c126.333,83.058) 125.27,84.122 ; AVR.27@124.829,83.058 cw(c126.333,83.058) 125.27,84.122 ; AVR.27@124.829,83.058 cw(c126.333,83.058) 125.27,84.122 ; AVR.27@124.829,83.058 cw(c126.333,83.058) 125.27,84.122 ; AVR.27@124.844,83.669 ccw(c124.814,83.82) 124.968,83.82 ; AVR.27@124.844,83.669 ccw(c124.814,83.82) 124.968,83.82 ; AVR.27@124.844,83.669 ccw(c124.814,83.82) 124.968,83.82 ; AVR.27@124.844,83.669 ccw(c124.814,83.82) 124.968,83.82 ; AVR.27@124.844,83.669 ccw(c124.814,83.82) 124.968,83.82 ; AVR.27@124.844,83.669 ccw(c124.814,83.82) 124.968,83.82 ; AVR.27@124.844,83.669 ccw(c124.814,83.82) 124.968,83.82 ; 124.968,83.82 ccw(c125.122,83.82) AVR.27@125.092,83.669 ; 124.968,83.82 ccw(c125.122,83.82) AVR.27@125.092,83.669 ; 124.968,83.82 ccw(c125.122,83.82) AVR.27@125.092,83.669 ; 124.968,83.82 ccw(c125.122,83.82) AVR.27@125.092,83.669 ; 124.968,83.82 ccw(c125.122,83.82) AVR.27@125.092,83.669 ; 124.968,83.82 ccw(c125.122,83.82) AVR.27@125.092,83.669 ; 124.968,83.82 ccw(c125.122,83.82) AVR.27@125.092,83.669 ; AVR.27@125.083,83.058 cw(c127.2,83.058) 125.703,84.555 ; AVR.27@125.083,83.058 cw(c127.2,83.058) 125.703,84.555 ; AVR.27@125.083,83.058 cw(c127.2,83.058) 125.703,84.555 ; AVR.27@125.083,83.058 cw(c127.2,83.058) 125.703,84.555 ; AVR.27@125.083,83.058 cw(c127.2,83.058) 125.703,84.555 ; AVR.27@125.083,83.058 cw(c127.2,83.058) 125.703,84.555 ; AVR.27@125.083,83.058 cw(c127.2,83.058) 125.703,84.555 ; AVR.27@125.337,83.058 cw(c128.067,83.058) 126.137,84.989 ; AVR.27@125.337,83.058 cw(c128.067,83.058) 126.137,84.989 ; AVR.27@125.337,83.058 cw(c128.067,83.058) 126.137,84.989 ; AVR.27@125.337,83.058 cw(c128.067,83.058) 126.137,84.989 ; AVR.27@125.337,83.058 cw(c128.067,83.058) 126.137,84.989 ; AVR.27@125.337,83.058 cw(c128.067,83.058) 126.137,84.989 ; AVR.27@125.337,83.058 cw(c128.067,83.058) 126.137,84.989 ; AVR.27@125.591,83.058 cw(c128.935,83.058) 126.57,85.422 ; AVR.27@125.591,83.058 cw(c128.935,83.058) 126.57,85.422 ; AVR.27@125.591,83.058 cw(c128.935,83.058) 126.57,85.422 ; AVR.27@125.591,83.058 cw(c128.935,83.058) 126.57,85.422 ; AVR.27@125.591,83.058 cw(c128.935,83.058) 126.57,85.422 ; AVR.27@125.591,83.058 cw(c128.935,83.058) 126.57,85.422 ; AVR.27@125.591,83.058 cw(c128.935,83.058) 126.57,85.422 ; 127.968,86.82 cw(c129.032,85.757) PC7~PC0.6@129.032,87.261 ; 127.968,86.82 ccw(c126.905,87.884) PC7~PC0.6@128.409,87.884 ; 127.968,86.82 cw(c129.032,85.757) PC7~PC0.6@129.032,87.261 ; 127.968,86.82 ccw(c126.905,87.884) PC7~PC0.6@128.409,87.884 ; 127.968,86.82 ccw(c126.905,87.884) PC7~PC0.6@128.409,87.884 ; 127.968,86.82 cw(c129.032,85.757) PC7~PC0.6@129.032,87.261 ; 127.968,86.82 ccw(c126.905,87.884) PC7~PC0.6@128.409,87.884 ; 127.968,86.82 cw(c129.032,85.757) PC7~PC0.6@129.032,87.261 ; 127.968,86.82 ccw(c126.905,87.884) PC7~PC0.6@128.409,87.884 ; 127.968,86.82 cw(c129.032,85.757) PC7~PC0.6@129.032,87.261 ; 127.968,86.82 ccw(c126.905,87.884) PC7~PC0.6@128.409,87.884 ; 127.968,86.82 cw(c129.032,85.757) PC7~PC0.6@129.032,87.261 ; 127.968,86.82 ccw(c126.905,87.884) PC7~PC0.6@128.409,87.884 ; 127.968,86.82 cw(c129.032,85.757) PC7~PC0.6@129.032,87.261 ; 128.402,87.254 cw(c129.032,86.624) PC7~PC0.6@129.032,87.515 ; 128.402,87.254 ccw(c127.772,87.884) PC7~PC0.6@128.663,87.884 ; 128.402,87.254 cw(c129.032,86.624) PC7~PC0.6@129.032,87.515 ; 128.402,87.254 ccw(c127.772,87.884) PC7~PC0.6@128.663,87.884 ; 128.402,87.254 ccw(c127.772,87.884) PC7~PC0.6@128.663,87.884 ; 128.402,87.254 cw(c129.032,86.624) PC7~PC0.6@129.032,87.515 ; 128.402,87.254 ccw(c127.772,87.884) PC7~PC0.6@128.663,87.884 ; 128.402,87.254 cw(c129.032,86.624) PC7~PC0.6@129.032,87.515 ; 128.402,87.254 ccw(c127.772,87.884) PC7~PC0.6@128.663,87.884 ; 128.402,87.254 cw(c129.032,86.624) PC7~PC0.6@129.032,87.515 ; 128.402,87.254 ccw(c127.772,87.884) PC7~PC0.6@128.663,87.884 ; 128.402,87.254 cw(c129.032,86.624) PC7~PC0.6@129.032,87.515 ; 128.402,87.254 ccw(c127.772,87.884) PC7~PC0.6@128.663,87.884 ; 128.402,87.254 cw(c129.032,86.624) PC7~PC0.6@129.032,87.515
  Bottom Layer w0.254: PC7~PC0.6@129.032,87.884 129.032,86.741 ; PC5.0@149.225,84.836 148.35,85.711 ; PC7~PC0.6@128.694,87.36 cw(c128.295,86.741) 129.032,86.741 ; PC7~PC0.6@128.694,87.36 cw(c128.295,86.741) 129.032,86.741 ; PC7~PC0.6@128.694,87.36 cw(c128.295,86.741) 129.032,86.741 ; PC7~PC0.6@128.694,87.36 cw(c128.295,86.741) 129.032,86.741 ; PC7~PC0.6@128.694,87.36 cw(c128.295,86.741) 129.032,86.741 ; PC7~PC0.6@128.694,87.36 cw(c128.295,86.741) 129.032,86.741 ; PC7~PC0.6@128.694,87.36 cw(c128.295,86.741) 129.032,86.741 ; 129.032,86.741 cw(c129.769,86.741) PC7~PC0.6@129.37,87.36 ; 129.032,86.741 cw(c129.769,86.741) PC7~PC0.6@129.37,87.36 ; 129.032,86.741 cw(c129.769,86.741) PC7~PC0.6@129.37,87.36 ; 129.032,86.741 cw(c129.769,86.741) PC7~PC0.6@129.37,87.36 ; 129.032,86.741 cw(c129.769,86.741) PC7~PC0.6@129.37,87.36 ; 129.032,86.741 cw(c129.769,86.741) PC7~PC0.6@129.37,87.36 ; 129.032,86.741 cw(c129.769,86.741) PC7~PC0.6@129.37,87.36 ; 129.032,86.741 130.062,85.711 148.35,85.711 ; 148.35,85.711 cw(c147.722,85.083) PC5.0@148.598,84.939 ; 148.35,85.711 ccw(c148.978,86.339) PC5.0@149.122,85.463 ; 148.35,85.711 cw(c147.722,85.083) PC5.0@148.598,84.939 ; 148.35,85.711 ccw(c148.978,86.339) PC5.0@149.122,85.463 ; 148.35,85.711 ccw(c148.978,86.339) PC5.0@149.122,85.463 ; 148.35,85.711 cw(c147.722,85.083) PC5.0@148.598,84.939 ; 148.35,85.711 ccw(c148.978,86.339) PC5.0@149.122,85.463 ; 148.35,85.711 cw(c147.722,85.083) PC5.0@148.598,84.939 ; 148.35,85.711 ccw(c148.978,86.339) PC5.0@149.122,85.463 ; 148.35,85.711 cw(c147.722,85.083) PC5.0@148.598,84.939 ; 148.35,85.711 ccw(c148.978,86.339) PC5.0@149.122,85.463 ; 148.35,85.711 cw(c147.722,85.083) PC5.0@148.598,84.939 ; 148.35,85.711 ccw(c148.978,86.339) PC5.0@149.122,85.463 ; 148.35,85.711 cw(c147.722,85.083) PC5.0@148.598,84.939
Net3_0: AVR.28 PC5.0@149.352,75.692 PC7~PC0.7 | length 172.4
  Top Layer w0.254: PC7~PC0.7@126.492,87.884 122.428,83.82 ; PC5.0@149.352,75.692 144.018,81.026 124.46,81.026 AVR.28@122.428,83.058 122.428,83.82 ; AVR.28@122.289,83.058 cw(c123.793,83.058) 122.73,84.122 ; AVR.28@122.289,83.058 cw(c123.793,83.058) 122.73,84.122 ; AVR.28@122.289,83.058 cw(c123.793,83.058) 122.73,84.122 ; AVR.28@122.289,83.058 cw(c123.793,83.058) 122.73,84.122 ; AVR.28@122.289,83.058 cw(c123.793,83.058) 122.73,84.122 ; AVR.28@122.289,83.058 cw(c123.793,83.058) 122.73,84.122 ; AVR.28@122.289,83.058 cw(c123.793,83.058) 122.73,84.122 ; AVR.28@122.304,83.669 ccw(c122.274,83.82) 122.428,83.82 ; AVR.28@122.304,83.669 ccw(c122.274,83.82) 122.428,83.82 ; AVR.28@122.304,83.669 ccw(c122.274,83.82) 122.428,83.82 ; AVR.28@122.304,83.669 ccw(c122.274,83.82) 122.428,83.82 ; AVR.28@122.304,83.669 ccw(c122.274,83.82) 122.428,83.82 ; AVR.28@122.304,83.669 ccw(c122.274,83.82) 122.428,83.82 ; AVR.28@122.304,83.669 ccw(c122.274,83.82) 122.428,83.82 ; AVR.28@122.428,82.435 cw(c122.428,80.931) 123.492,81.994 ; AVR.28@122.428,82.435 cw(c122.428,80.931) 123.492,81.994 ; AVR.28@122.428,82.435 cw(c122.428,80.931) 123.492,81.994 ; AVR.28@122.428,82.435 cw(c122.428,80.931) 123.492,81.994 ; AVR.28@122.428,82.435 cw(c122.428,80.931) 123.492,81.994 ; AVR.28@122.428,82.435 cw(c122.428,80.931) 123.492,81.994 ; AVR.28@122.428,82.435 cw(c122.428,80.931) 123.492,81.994 ; AVR.28@122.428,82.689 cw(c122.428,81.798) 123.058,82.428 ; AVR.28@122.428,82.689 cw(c122.428,81.798) 123.058,82.428 ; AVR.28@122.428,82.689 cw(c122.428,81.798) 123.058,82.428 ; AVR.28@122.428,82.689 cw(c122.428,81.798) 123.058,82.428 ; AVR.28@122.428,82.689 cw(c122.428,81.798) 123.058,82.428 ; AVR.28@122.428,82.689 cw(c122.428,81.798) 123.058,82.428 ; AVR.28@122.428,82.689 cw(c122.428,81.798) 123.058,82.428 ; 122.428,83.82 ccw(c122.582,83.82) AVR.28@122.552,83.669 ; 122.428,83.82 ccw(c122.582,83.82) AVR.28@122.552,83.669 ; 122.428,83.82 ccw(c122.582,83.82) AVR.28@122.552,83.669 ; 122.428,83.82 ccw(c122.582,83.82) AVR.28@122.552,83.669 ; 122.428,83.82 ccw(c122.582,83.82) AVR.28@122.552,83.669 ; 122.428,83.82 ccw(c122.582,83.82) AVR.28@122.552,83.669 ; 122.428,83.82 ccw(c122.582,83.82) AVR.28@122.552,83.669 ; AVR.28@122.543,83.058 cw(c124.66,83.058) 123.163,84.555 ; AVR.28@122.543,83.058 cw(c124.66,83.058) 123.163,84.555 ; AVR.28@122.543,83.058 cw(c124.66,83.058) 123.163,84.555 ; AVR.28@122.543,83.058 cw(c124.66,83.058) 123.163,84.555 ; AVR.28@122.543,83.058 cw(c124.66,83.058) 123.163,84.555 ; AVR.28@122.543,83.058 cw(c124.66,83.058) 123.163,84.555 ; AVR.28@122.543,83.058 cw(c124.66,83.058) 123.163,84.555 ; AVR.28@122.797,83.058 ccw(c123.688,83.058) 123.058,82.428 ; AVR.28@122.797,83.058 cw(c125.527,83.058) 123.597,84.989 ; AVR.28@122.797,83.058 ccw(c123.688,83.058) 123.058,82.428 ; AVR.28@122.797,83.058 cw(c125.527,83.058) 123.597,84.989 ; AVR.28@122.797,83.058 cw(c125.527,83.058) 123.597,84.989 ; AVR.28@122.797,83.058 ccw(c123.688,83.058) 123.058,82.428 ; AVR.28@122.797,83.058 cw(c125.527,83.058) 123.597,84.989 ; AVR.28@122.797,83.058 ccw(c123.688,83.058) 123.058,82.428 ; AVR.28@122.797,83.058 cw(c125.527,83.058) 123.597,84.989 ; AVR.28@122.797,83.058 ccw(c123.688,83.058) 123.058,82.428 ; AVR.28@122.797,83.058 cw(c125.527,83.058) 123.597,84.989 ; AVR.28@122.797,83.058 ccw(c123.688,83.058) 123.058,82.428 ; AVR.28@122.797,83.058 cw(c125.527,83.058) 123.597,84.989 ; AVR.28@122.797,83.058 ccw(c123.688,83.058) 123.058,82.428 ; AVR.28@123.051,83.058 ccw(c124.555,83.058) 123.492,81.994 ; AVR.28@123.051,83.058 cw(c126.395,83.058) 124.03,85.422 ; AVR.28@123.051,83.058 ccw(c124.555,83.058) 123.492,81.994 ; AVR.28@123.051,83.058 cw(c126.395,83.058) 124.03,85.422 ; AVR.28@123.051,83.058 cw(c126.395,83.058) 124.03,85.422 ; AVR.28@123.051,83.058 ccw(c124.555,83.058) 123.492,81.994 ; AVR.28@123.051,83.058 cw(c126.395,83.058) 124.03,85.422 ; AVR.28@123.051,83.058 ccw(c124.555,83.058) 123.492,81.994 ; AVR.28@123.051,83.058 cw(c126.395,83.058) 124.03,85.422 ; AVR.28@123.051,83.058 ccw(c124.555,83.058) 123.492,81.994 ; AVR.28@123.051,83.058 cw(c126.395,83.058) 124.03,85.422 ; AVR.28@123.051,83.058 ccw(c124.555,83.058) 123.492,81.994 ; AVR.28@123.051,83.058 cw(c126.395,83.058) 124.03,85.422 ; AVR.28@123.051,83.058 ccw(c124.555,83.058) 123.492,81.994 ; 125.428,86.82 cw(c126.492,85.757) PC7~PC0.7@126.492,87.261 ; 125.428,86.82 ccw(c124.365,87.884) PC7~PC0.7@125.869,87.884 ; 125.428,86.82 cw(c126.492,85.757) PC7~PC0.7@126.492,87.261 ; 125.428,86.82 ccw(c124.365,87.884) PC7~PC0.7@125.869,87.884 ; 125.428,86.82 ccw(c124.365,87.884) PC7~PC0.7@125.869,87.884 ; 125.428,86.82 cw(c126.492,85.757) PC7~PC0.7@126.492,87.261 ; 125.428,86.82 ccw(c124.365,87.884) PC7~PC0.7@125.869,87.884 ; 125.428,86.82 cw(c126.492,85.757) PC7~PC0.7@126.492,87.261 ; 125.428,86.82 ccw(c124.365,87.884) PC7~PC0.7@125.869,87.884 ; 125.428,86.82 cw(c126.492,85.757) PC7~PC0.7@126.492,87.261 ; 125.428,86.82 ccw(c124.365,87.884) PC7~PC0.7@125.869,87.884 ; 125.428,86.82 cw(c126.492,85.757) PC7~PC0.7@126.492,87.261 ; 125.428,86.82 ccw(c124.365,87.884) PC7~PC0.7@125.869,87.884 ; 125.428,86.82 cw(c126.492,85.757) PC7~PC0.7@126.492,87.261 ; 125.862,87.254 cw(c126.492,86.624) PC7~PC0.7@126.492,87.515 ; 125.862,87.254 ccw(c125.232,87.884) PC7~PC0.7@126.123,87.884 ; 125.862,87.254 cw(c126.492,86.624) PC7~PC0.7@126.492,87.515 ; 125.862,87.254 ccw(c125.232,87.884) PC7~PC0.7@126.123,87.884 ; 125.862,87.254 ccw(c125.232,87.884) PC7~PC0.7@126.123,87.884 ; 125.862,87.254 cw(c126.492,86.624) PC7~PC0.7@126.492,87.515 ; 125.862,87.254 ccw(c125.232,87.884) PC7~PC0.7@126.123,87.884 ; 125.862,87.254 cw(c126.492,86.624) PC7~PC0.7@126.492,87.515 ; 125.862,87.254 ccw(c125.232,87.884) PC7~PC0.7@126.123,87.884 ; 125.862,87.254 cw(c126.492,86.624) PC7~PC0.7@126.492,87.515 ; 125.862,87.254 ccw(c125.232,87.884) PC7~PC0.7@126.123,87.884 ; 125.862,87.254 cw(c126.492,86.624) PC7~PC0.7@126.492,87.515 ; 125.862,87.254 ccw(c125.232,87.884) PC7~PC0.7@126.123,87.884 ; 125.862,87.254 cw(c126.492,86.624) PC7~PC0.7@126.492,87.515 ; 148.268,76.776 cw(c147.184,75.692) PC5.0@148.717,75.692 ; 148.268,76.776 ccw(c149.352,77.86) PC5.0@149.352,76.327 ; 148.268,76.776 cw(c147.184,75.692) PC5.0@148.717,75.692 ; 148.268,76.776 ccw(c149.352,77.86) PC5.0@149.352,76.327 ; 148.268,76.776 ccw(c149.352,77.86) PC5.0@149.352,76.327 ; 148.268,76.776 cw(c147.184,75.692) PC5.0@148.717,75.692 ; 148.268,76.776 ccw(c149.352,77.86) PC5.0@149.352,76.327 ; 148.268,76.776 cw(c147.184,75.692) PC5.0@148.717,75.692 ; 148.268,76.776 ccw(c149.352,77.86) PC5.0@149.352,76.327 ; 148.268,76.776 cw(c147.184,75.692) PC5.0@148.717,75.692 ; 148.268,76.776 ccw(c149.352,77.86) PC5.0@149.352,76.327 ; 148.268,76.776 cw(c147.184,75.692) PC5.0@148.717,75.692 ; 148.268,76.776 ccw(c149.352,77.86) PC5.0@149.352,76.327 ; 148.268,76.776 cw(c147.184,75.692) PC5.0@148.717,75.692 ; 148.702,76.342 cw(c148.051,75.692) PC5.0@148.971,75.692 ; 148.702,76.342 ccw(c149.352,76.993) PC5.0@149.352,76.073 ; 148.702,76.342 cw(c148.051,75.692) PC5.0@148.971,75.692 ; 148.702,76.342 ccw(c149.352,76.993) PC5.0@149.352,76.073 ; 148.702,76.342 ccw(c149.352,76.993) PC5.0@149.352,76.073 ; 148.702,76.342 cw(c148.051,75.692) PC5.0@148.971,75.692 ; 148.702,76.342 ccw(c149.352,76.993) PC5.0@149.352,76.073 ; 148.702,76.342 cw(c148.051,75.692) PC5.0@148.971,75.692 ; 148.702,76.342 ccw(c149.352,76.993) PC5.0@149.352,76.073 ; 148.702,76.342 cw(c148.051,75.692) PC5.0@148.971,75.692 ; 148.702,76.342 ccw(c149.352,76.993) PC5.0@149.352,76.073 ; 148.702,76.342 cw(c148.051,75.692) PC5.0@148.971,75.692 ; 148.702,76.342 ccw(c149.352,76.993) PC5.0@149.352,76.073 ; 148.702,76.342 cw(c148.051,75.692) PC5.0@148.971,75.692
Net3_2: 